# Altium PCB Demo_v1_2.PcbDoc (part 1 of 2)
Units mil, origin at the board's own origin, x right, y up, seen from the top; angles counter-clockwise.
Board outline 4921.26 x 5610.24 mil, 2 copper layers (Top Layer, Bottom Layer); 188 components, 170 nets, 730 pads, 115 vias.
Unrouted connection lines stored in the file: 12.
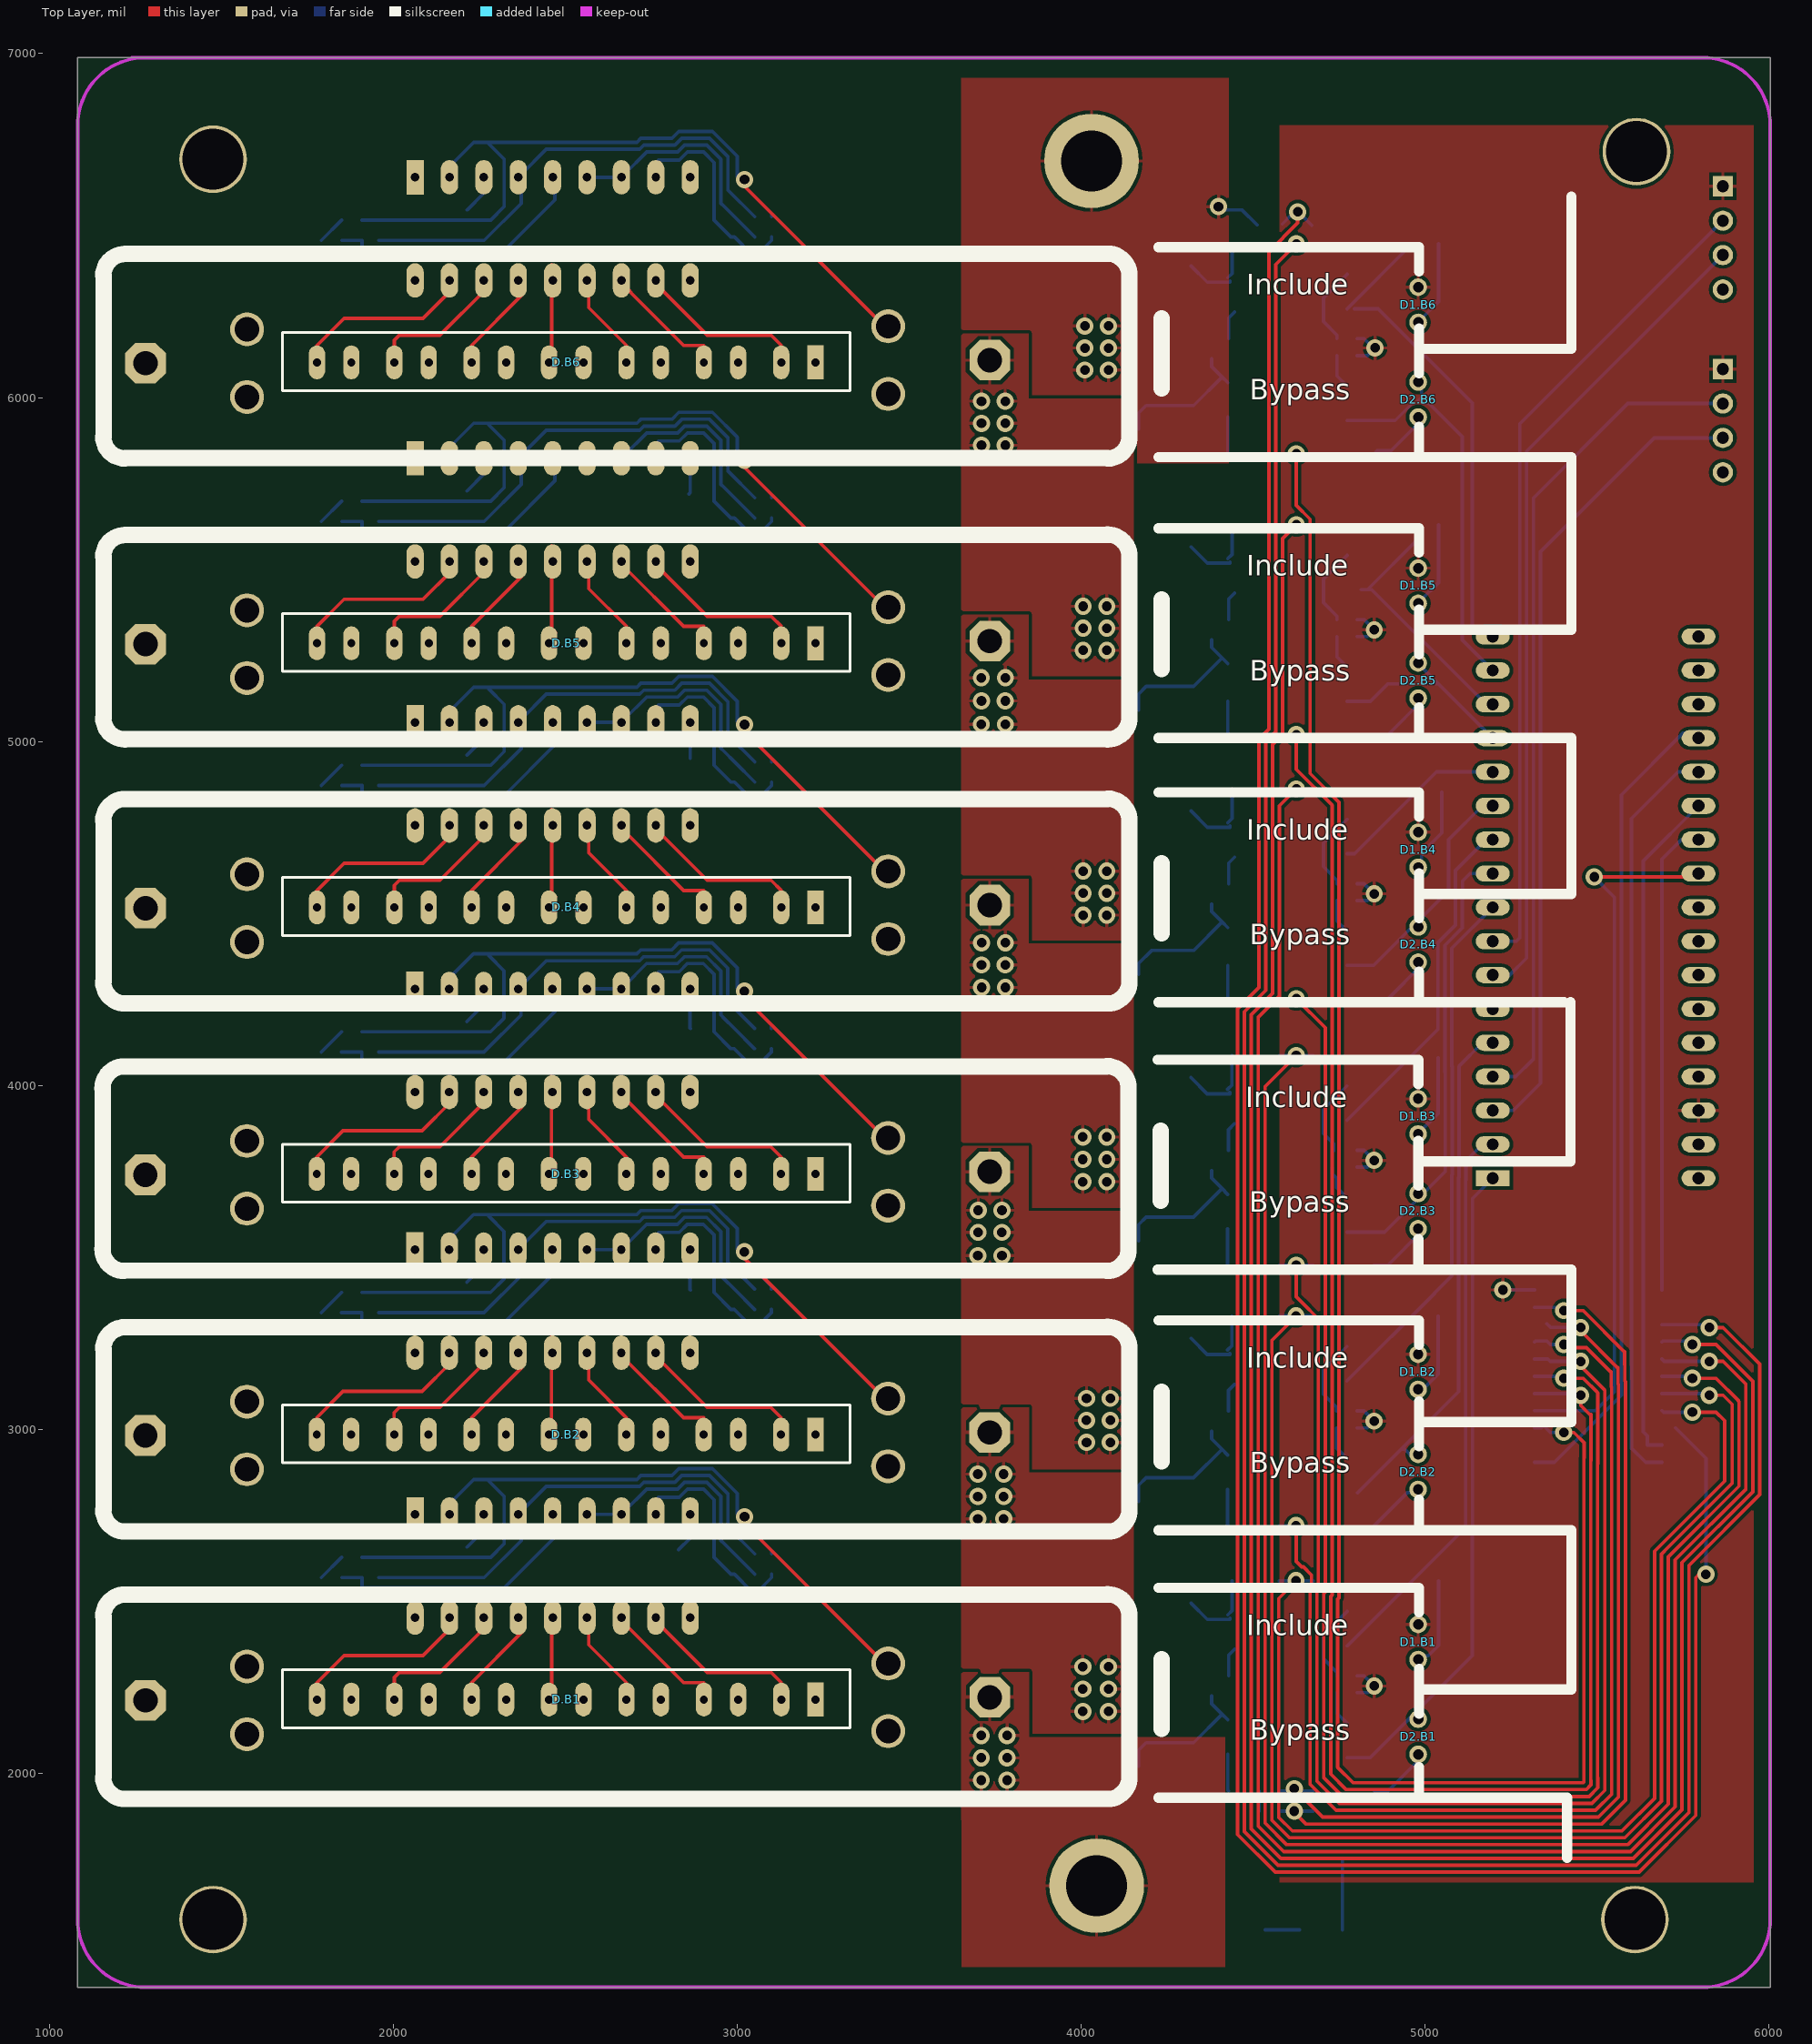
[diagram p0: Top Layer view]
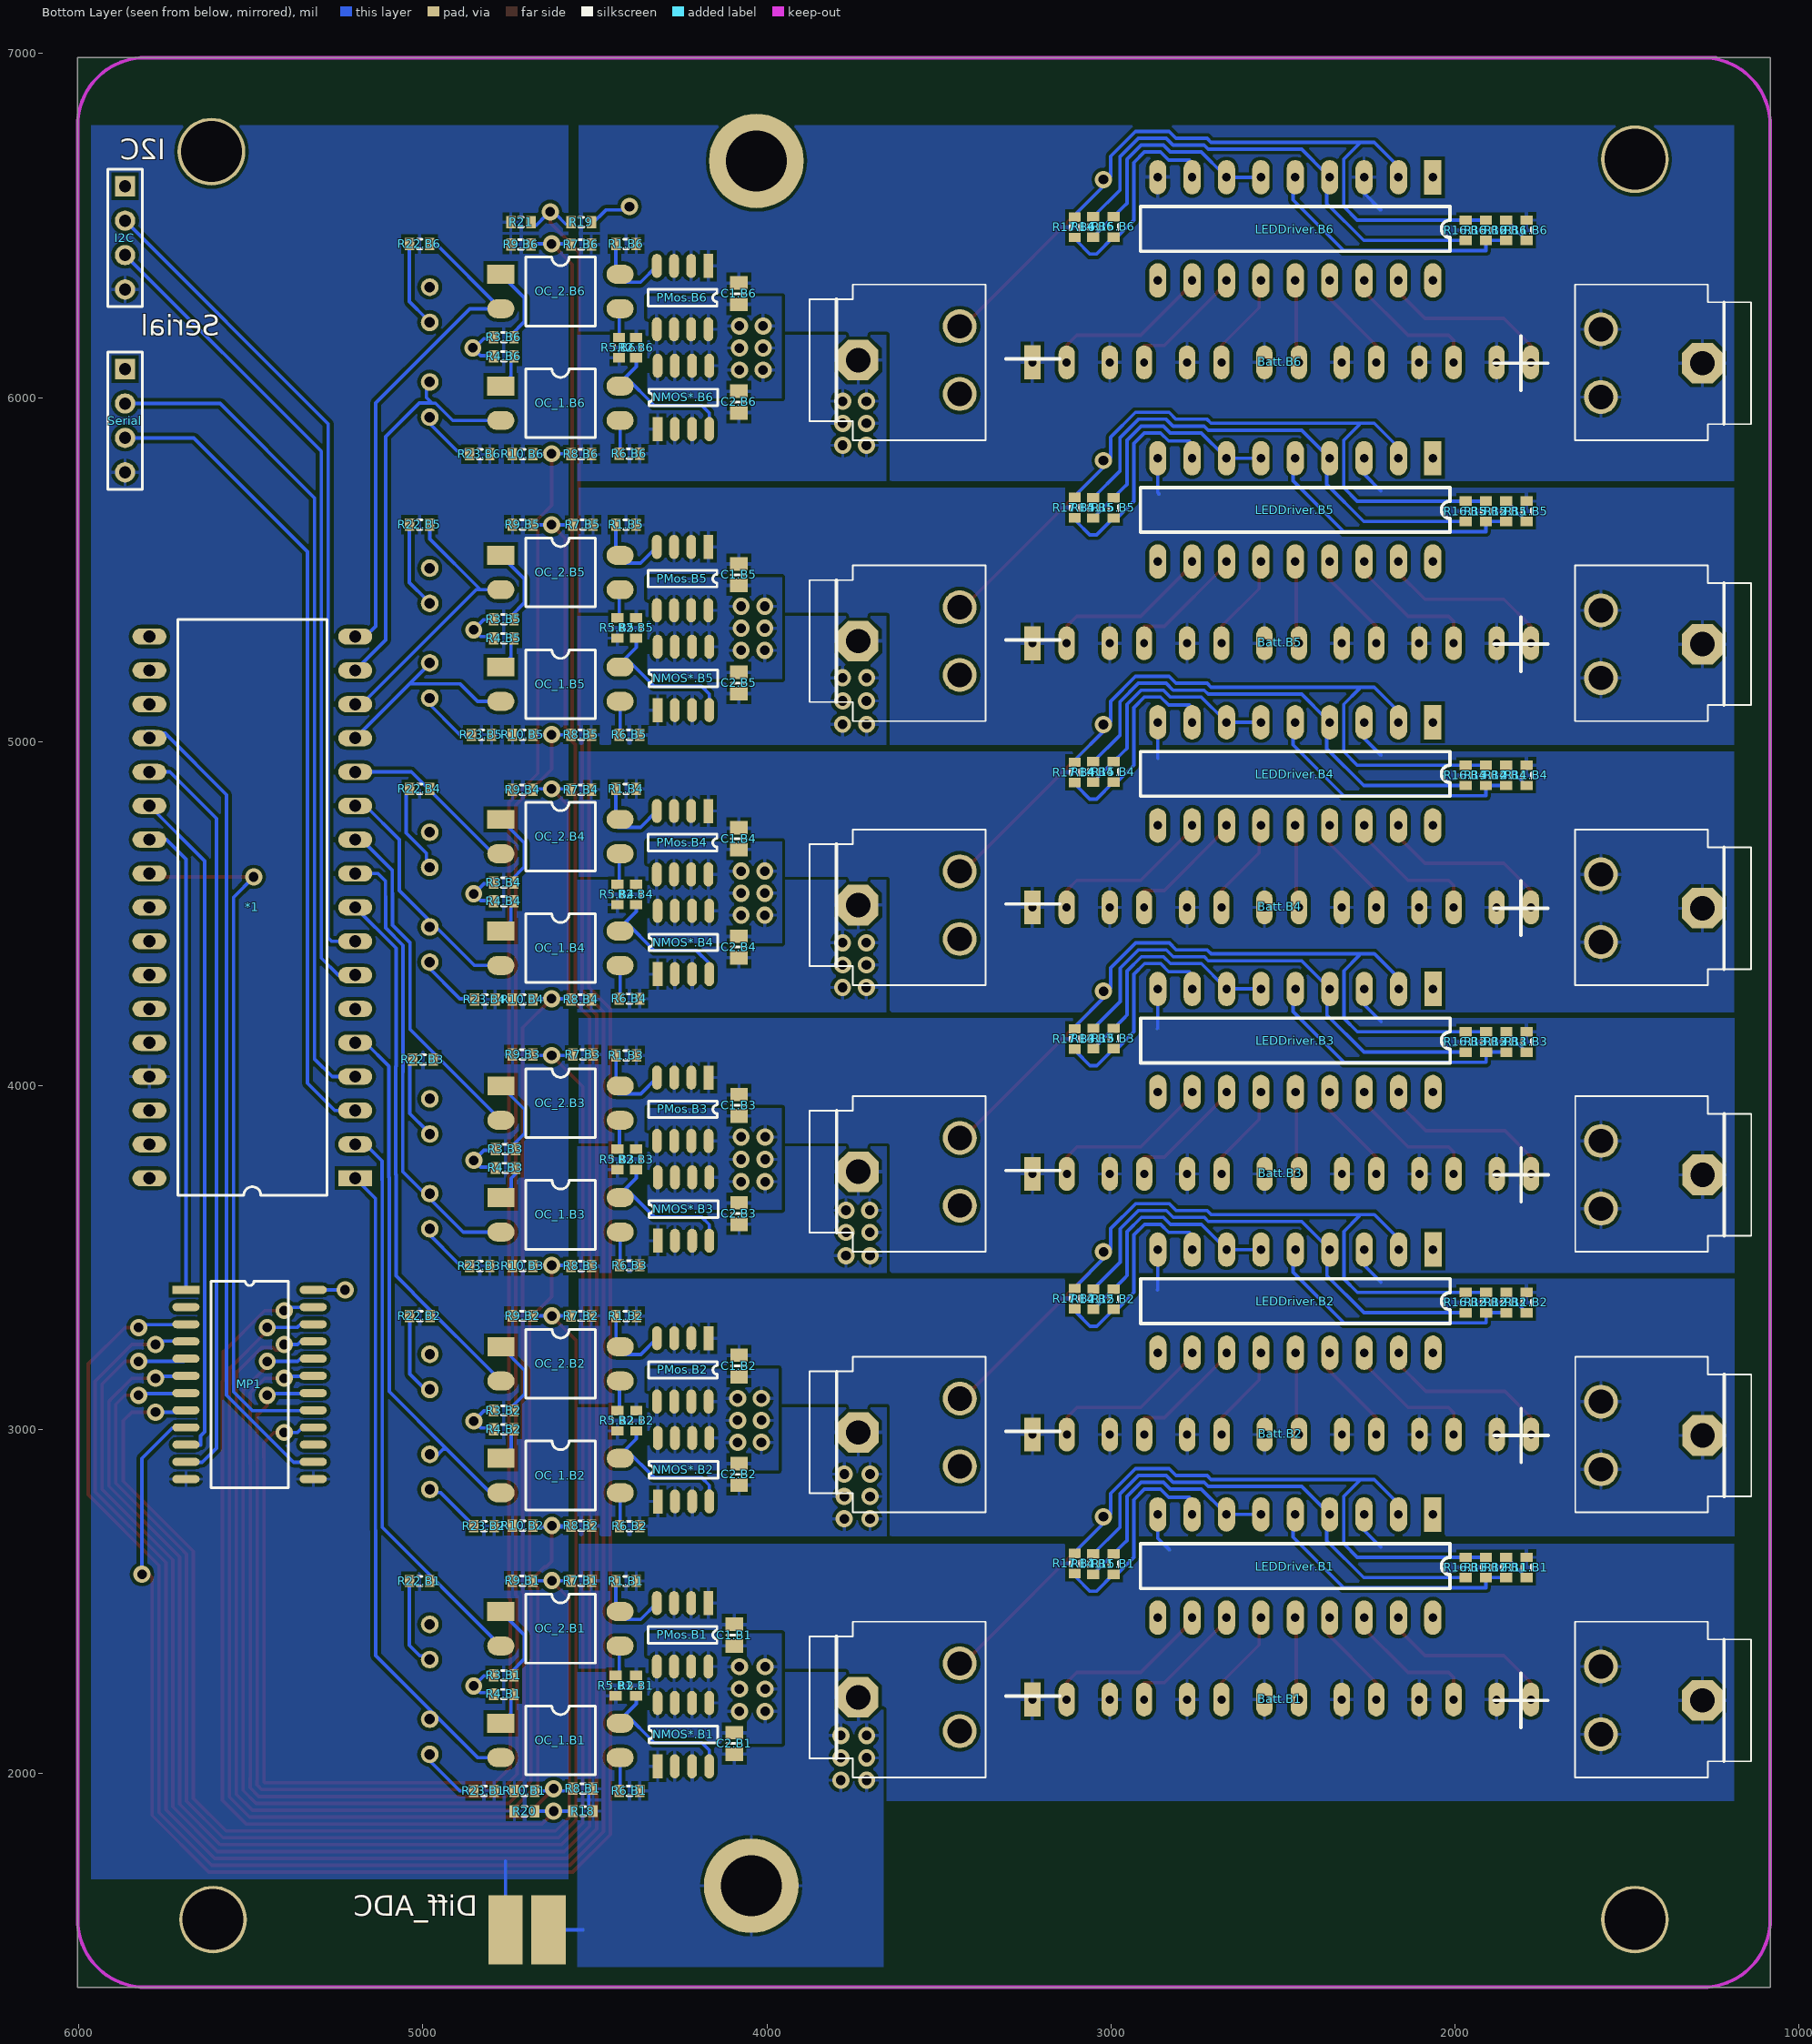
[diagram p1: Bottom Layer view, seen from below]

## Layer stack, top to bottom
Top Solder: solder mask 0.4, Solder Resist, Dk 3.5
Top Layer: signal copper 1.4
Dielectric 1: dielectric 12.6, FR-4, Dk 4.8
Bottom Layer: signal copper 1.4
Bottom Solder: solder mask 0.4, Solder Resist, Dk 3.5

## Board outline
1082.68,1377.95 6003.94,1377.95 6003.94,6988.19 1082.68,6988.19

## Design rules (kind name [scope] priority, off if disabled: settings)
Clearance [All] p1: gap=10
ComponentClearance ComponentClearance_1 [HasFootprint('6-0805_L') vs HasFootprint('DIP18')] p1: gap=0 collisioncheckmode=3 verticalgap=0 showdistances=FALSE
ComponentClearance [All] p2: gap=10 collisioncheckmode=3 verticalgap=10 showdistances=FALSE
HoleSize [All] p1: absolutevalues=TRUE maxlimit=248.03 minlimit=11.81 maxpercent=80.000 minpercent=20.000
MinimumSolderMaskSliver [All] p1: minsoldermaskwidth=6
PolygonConnect [All] p1: connectstyle=Relief reliefconductorwidth=10 reliefentries=4 polygonreliefangle="90 Angle" airgapwidth=10
RoomDefinition SwitchingModule [InComponentClass('SwitchingModule')] p1: confinementstyle=ConfineIn formatcopy=TRUE lockcomponents=FALSE outline 4429.13,1653.54 5994.09,1653.54 5994.09,6742.13 4429.13,6742.13
RoomDefinition B2 [InComponentClass('B2')] p2: confinementstyle=ConfineIn formatcopy=TRUE lockcomponents=FALSE outline 1121.65,2669.78 5304.72,2669.78 5304.72,3663.88 1121.65,3663.88
RoomDefinition u1 [InComponentClass('u1')] p3: confinementstyle=ConfineIn formatcopy=TRUE lockcomponents=FALSE outline 5078.74,3641.02 5925.2,3641.02 5925.2,6692.91 5078.74,6692.91
RoomDefinition Mutliplex [InComponentClass('Mutliplex')] p4: confinementstyle=ConfineIn formatcopy=TRUE lockcomponents=FALSE outline 4906.97,2651.18 5994.09,2651.18 5994.09,3635.43 4906.97,3635.43
RoomDefinition B6 [InComponentClass('B6')] p5: confinementstyle=ConfineIn formatcopy=TRUE lockcomponents=FALSE outline 1122.05,5787.4 5305.12,5787.4 5305.12,6781.5 1122.05,6781.5
RoomDefinition B5 [InComponentClass('B5')] p6: confinementstyle=ConfineIn formatcopy=TRUE lockcomponents=FALSE outline 1122.05,4970.47 5305.12,4970.47 5305.12,5964.57 1122.05,5964.57
RoomDefinition B4 [InComponentClass('B4')] p7: confinementstyle=ConfineIn formatcopy=TRUE lockcomponents=FALSE outline 1122.05,4202.76 5305.12,4202.76 5305.12,5196.85 1122.05,5196.85
RoomDefinition B3 [InComponentClass('B3')] p8: confinementstyle=ConfineIn formatcopy=TRUE lockcomponents=FALSE outline 1121.65,3427.66 5304.72,3427.66 5304.72,4421.75 1121.65,4421.75
RoomDefinition B1 [InComponentClass('B1')] p9: confinementstyle=ConfineIn formatcopy=TRUE lockcomponents=FALSE outline 1122.05,1899.61 5305.12,1899.61 5305.12,2893.7 1122.05,2893.7
RoutingVias [All] p1: holewidth=28 width=50 viastyle="Through Hole" minholewidth=28 minwidth=50 maxholewidth=28 maxwidth=50
SilkToSolderMaskClearance [IsPad] p1 off: minsilkscreentomaskgap=10 clearancetoexposedcopper=TRUE
SolderMaskExpansion [All] p1: expansion=4
Width [All] p1: maxlimit=10 minlimit=10 preferedwidth=10
26 further rules are at their usual default settings.

## Classes and differential pairs
net class B-ADC[6..1]: B-ADC1 B-ADC2 B-ADC3 B-ADC4 B-ADC5 B-ADC6
net class B+ADC[6..1]: B+ADC1 B+ADC2 B+ADC3 B+ADC4 B+ADC5 B+ADC6
component class Mutliplex: MP1
channel class BS: B1 B2 B3 B4 B5 B6
net class PCTRL[6..1]: PCTRL1 PCTRL2 PCTRL3 PCTRL4 PCTRL5 PCTRL6
net class NCTRL[6..1]: NCTRL1 NCTRL2 NCTRL3 NCTRL4 NCTRL5 NCTRL6
net class B_OUT[6..1]: B_OUT6
net class B_IN[6..1]: B_IN1 B_IN2 B_IN3 B_IN4 B_IN5 B_IN6
component class u1: *1 I2C Serial
component class SwitchingModule: R18 R19 R20 R21
component class B6: Batt.B6 C1.B6 C2.B6 D1.B6 D2.B6 D.B6 LEDDriver.B6 NMOS*.B6 OC_1.B6 OC_2.B6 PMos.B6 R1.B6 R2.B6 R3.B6 R4.B6 R5.B6 R6.B6 R7.B6 R8.B6 R9.B6 R10.B6 R11.B6 R12.B6 R13.B6 R14.B6 R15.B6 R16.B6 R17.B6 R22.B6 R23.B6
component class B5: Batt.B5 C1.B5 C2.B5 D1.B5 D2.B5 D.B5 LEDDriver.B5 NMOS*.B5 OC_1.B5 OC_2.B5 PMos.B5 R1.B5 R2.B5 R3.B5 R4.B5 R5.B5 R6.B5 R7.B5 R8.B5 R9.B5 R10.B5 R11.B5 R12.B5 R13.B5 R14.B5 R15.B5 R16.B5 R17.B5 R22.B5 R23.B5
component class B4: Batt.B4 C1.B4 C2.B4 D1.B4 D2.B4 D.B4 LEDDriver.B4 NMOS*.B4 OC_1.B4 OC_2.B4 PMos.B4 R1.B4 R2.B4 R3.B4 R4.B4 R5.B4 R6.B4 R7.B4 R8.B4 R9.B4 R10.B4 R11.B4 R12.B4 R13.B4 R14.B4 R15.B4 R16.B4 R17.B4 R22.B4 R23.B4
component class B3: Batt.B3 C1.B3 C2.B3 D1.B3 D2.B3 D.B3 LEDDriver.B3 NMOS*.B3 OC_1.B3 OC_2.B3 PMos.B3 R1.B3 R2.B3 R3.B3 R4.B3 R5.B3 R6.B3 R7.B3 R8.B3 R9.B3 R10.B3 R11.B3 R12.B3 R13.B3 R14.B3 R15.B3 R16.B3 R17.B3 R22.B3 R23.B3
component class B2: Batt.B2 C1.B2 C2.B2 D1.B2 D2.B2 D.B2 LEDDriver.B2 NMOS*.B2 OC_1.B2 OC_2.B2 PMos.B2 R1.B2 R2.B2 R3.B2 R4.B2 R5.B2 R6.B2 R7.B2 R8.B2 R9.B2 R10.B2 R11.B2 R12.B2 R13.B2 R14.B2 R15.B2 R16.B2 R17.B2 R22.B2 R23.B2
component class B1: Batt.B1 C1.B1 C2.B1 D1.B1 D2.B1 D.B1 LEDDriver.B1 NMOS*.B1 OC_1.B1 OC_2.B1 PMos.B1 R1.B1 R2.B1 R3.B1 R4.B1 R5.B1 R6.B1 R7.B1 R8.B1 R9.B1 R10.B1 R11.B1 R12.B1 R13.B1 R14.B1 R15.B1 R16.B1 R17.B1 R22.B1 R23.B1

## Components (designator, comment, footprint, x,y, rotation, side; value= is the part's Value field where it differs from the comment)
*1 "Arduino_Micro" DIP34 5196.85,3730.32 r0 bottom
Batt.B1 "Antenna" 18650_PCB_HOLDER 2518.11,2224.41 r0 bottom (schematic designator Batt)
Batt.B2 "Antenna" 18650_PCB_HOLDER 2517.72,2994.59 r0 bottom (schematic designator Batt)
Batt.B3 "Antenna" 18650_PCB_HOLDER 2517.72,3752.46 r0 bottom (schematic designator Batt)
Batt.B4 "Antenna" 18650_PCB_HOLDER 2518.11,4527.56 r0 bottom (schematic designator Batt)
Batt.B5 "Antenna" 18650_PCB_HOLDER 2518.11,5295.28 r0 bottom (schematic designator Batt)
Batt.B6 "Antenna" 18650_PCB_HOLDER 2518.11,6112.2 r0 bottom (schematic designator Batt)
C1.B1 "Cap" 6-0805_L 4094.49,2401.57 r90 bottom (schematic designator C1)
C1.B2 "Cap" 6-0805_L 4081.02,3184.23 r90 bottom (schematic designator C1)
C1.B3 "Cap" 6-0805_L 4081.02,3942.11 r90 bottom (schematic designator C1)
C1.B4 "Cap" 6-0805_L 4081.42,4717.2 r90 bottom (schematic designator C1)
C1.B5 "Cap" 6-0805_L 4081.42,5484.92 r90 bottom (schematic designator C1)
C1.B6 "Cap" 6-0805_L 4081.42,6301.85 r90 bottom (schematic designator C1)
C2.B1 "Cap" 6-0805_L 4094.49,2086.61 r90 bottom (schematic designator C2)
C2.B2 "Cap" 6-0805_L 4081.02,2869.27 r90 bottom (schematic designator C2)
C2.B3 "Cap" 6-0805_L 4081.02,3627.15 r90 bottom (schematic designator C2)
C2.B4 "Cap" 6-0805_L 4081.42,4402.24 r90 bottom (schematic designator C2)
C2.B5 "Cap" 6-0805_L 4081.42,5169.96 r90 bottom (schematic designator C2)
C2.B6 "Cap" 6-0805_L 4081.42,5986.89 r90 bottom (schematic designator C2)
D1.B1 "LED1" LED 4980.31,2381.89 r270 top (schematic designator D1)
D1.B2 "LED1" LED 4979.92,3167.35 r270 top (schematic designator D1)
D1.B3 "LED1" LED 4979.92,3909.94 r270 top (schematic designator D1)
D1.B4 "LED1" LED 4980.31,4685.04 r270 top (schematic designator D1)
D1.B5 "LED1" LED 4980.31,5452.76 r270 top (schematic designator D1)
D1.B6 "LED1" LED 4980.31,6269.69 r270 top (schematic designator D1)
D2.B1 "LED1" LED 4980.31,2106.3 r270 top (schematic designator D2)
D2.B2 "LED1" LED 4979.92,2876.48 r270 top (schematic designator D2)
D2.B3 "LED1" LED 4979.92,3634.35 r270 top (schematic designator D2)
D2.B4 "LED1" LED 4980.31,4409.45 r270 top (schematic designator D2)
D2.B5 "LED1" LED 4980.31,5177.17 r270 top (schematic designator D2)
D2.B6 "LED1" LED 4980.31,5994.09 r270 top (schematic designator D2)
D.B1 "LED" "LED Strip" 3228.35,2214.57 r270 top (schematic designator D)
D.B2 "LED" "LED Strip" 3227.95,2984.74 r270 top (schematic designator D)
D.B3 "LED" "LED Strip" 3227.95,3742.62 r270 top (schematic designator D)
D.B4 "LED" "LED Strip" 3228.35,4517.72 r270 top (schematic designator D)
D.B5 "LED" "LED Strip" 3228.35,5285.43 r270 top (schematic designator D)
D.B6 "LED" "LED Strip" 3228.35,6102.36 r270 top (schematic designator D)
I2C "I2C Header" HDR1X4 5866.14,6614.17 r270 bottom
LEDDriver.B1 "LM3914" DIP18 2063.7,2752.64 r270 bottom (schematic designator LEDDriver)
LEDDriver.B2 "LM3914" DIP18 2063.31,3522.82 r270 bottom (schematic designator LEDDriver)
LEDDriver.B3 "LM3914" DIP18 2063.31,4280.69 r270 bottom (schematic designator LEDDriver)
LEDDriver.B4 "LM3914" DIP18 2063.7,5055.79 r270 bottom (schematic designator LEDDriver)
LEDDriver.B5 "LM3914" DIP18 2063.7,5823.5 r270 bottom (schematic designator LEDDriver)
LEDDriver.B6 "LM3914" DIP18 2063.7,6640.43 r270 bottom (schematic designator LEDDriver)
MP1 "Multiplexer CD4097" SOIC24 5688.98,3405.51 r180 bottom
NMOS*.B1 "Mosfet-N" MOSFET 4317.64,2020.35 r90 bottom (schematic designator NMOS*)
NMOS*.B2 "Mosfet-N" MOSFET 4317.24,2790.53 r90 bottom (schematic designator NMOS*)
NMOS*.B3 "Mosfet-N" MOSFET 4317.24,3548.41 r90 bottom (schematic designator NMOS*)
NMOS*.B4 "Mosfet-N" MOSFET 4317.64,4323.5 r90 bottom (schematic designator NMOS*)
NMOS*.B5 "Mosfet-N" MOSFET 4317.64,5091.22 r90 bottom (schematic designator NMOS*)
NMOS*.B6 "Mosfet-N" MOSFET 4317.64,5908.15 r90 bottom (schematic designator NMOS*)
OC_1.B1 "OptoCoupler" SMDIP4 4773.62,2145.67 r180 bottom (schematic designator OC_1)
OC_1.B2 "OptoCoupler" SMDIP4 4773.23,2915.85 r180 bottom (schematic designator OC_1)
OC_1.B3 "OptoCoupler" SMDIP4 4773.23,3673.72 r180 bottom (schematic designator OC_1)
OC_1.B4 "OptoCoupler" SMDIP4 4773.62,4448.82 r180 bottom (schematic designator OC_1)
OC_1.B5 "OptoCoupler" SMDIP4 4773.62,5216.54 r180 bottom (schematic designator OC_1)
OC_1.B6 "OptoCoupler" SMDIP4 4773.62,6033.46 r180 bottom (schematic designator OC_1)
OC_2.B1 "OptoCoupler" SMDIP4 4773.62,2470.47 r180 bottom (schematic designator OC_2)
OC_2.B2 "OptoCoupler" SMDIP4 4773.23,3240.65 r180 bottom (schematic designator OC_2)
OC_2.B3 "OptoCoupler" SMDIP4 4773.23,3998.52 r180 bottom (schematic designator OC_2)
OC_2.B4 "OptoCoupler" SMDIP4 4773.62,4773.62 r180 bottom (schematic designator OC_2)
OC_2.B5 "OptoCoupler" SMDIP4 4773.62,5541.34 r180 bottom (schematic designator OC_2)
OC_2.B6 "OptoCoupler" SMDIP4 4773.62,6358.27 r180 bottom (schematic designator OC_2)
PMos.B1 "Mosfet-P" MOSFET 4170,2494.76 r270 bottom (schematic designator PMos)
PMos.B2 "Mosfet-P" MOSFET 4169.61,3264.94 r270 bottom (schematic designator PMos)
PMos.B3 "Mosfet-P" MOSFET 4169.61,4022.82 r270 bottom (schematic designator PMos)
PMos.B4 "Mosfet-P" MOSFET 4170,4797.91 r270 bottom (schematic designator PMos)
PMos.B5 "Mosfet-P" MOSFET 4170,5565.63 r270 bottom (schematic designator PMos)
PMos.B6 "Mosfet-P" MOSFET 4170,6382.56 r270 bottom (schematic designator PMos)
R1.B1 "Res3" J1-0603 4409.45,2559.05 r180 bottom (schematic designator R1)
R1.B2 "Res3" J1-0603 4409.06,3329.23 r180 bottom (schematic designator R1)
R1.B3 "Res3" J1-0603 4409.06,4087.11 r180 bottom (schematic designator R1)
R1.B4 "Res3" J1-0603 4409.45,4862.2 r180 bottom (schematic designator R1)
R1.B5 "Res3" J1-0603 4409.45,5629.92 r180 bottom (schematic designator R1)
R1.B6 "Res3" J1-0603 4409.45,6446.85 r180 bottom (schematic designator R1)
R2.B1 "Res3" J1-0603 4380,2255 r90 bottom (schematic designator R2)
R2.B2 "Res3" J1-0603 4379.61,3025.18 r90 bottom (schematic designator R2)
R2.B3 "Res3" J1-0603 4380,3785 r90 bottom (schematic designator R2)
R2.B4 "Res3" J1-0603 4380,4555 r90 bottom (schematic designator R2)
R2.B5 "Res3" J1-0603 4380,5330 r90 bottom (schematic designator R2)
R2.B6 "Res3" J1-0603 4380,6145 r90 bottom (schematic designator R2)
R3.B1 "Res3" J1-0603 4765,2285 r0 bottom (schematic designator R3)
R3.B2 "Res3" J1-0603 4765,3055 r0 bottom (schematic designator R3)
R3.B3 "Res3" J1-0603 4760,3815 r0 bottom (schematic designator R3)
R3.B4 "Res3" J1-0603 4765,4590 r0 bottom (schematic designator R3)
R3.B5 "Res3" J1-0603 4765,5355 r0 bottom (schematic designator R3)
R3.B6 "Res3" J1-0603 4765,6175 r0 bottom (schematic designator R3)
R4.B1 "Res3" J1-0603 4765,2230 r0 bottom (schematic designator R4)
R4.B2 "Res3" J1-0603 4765,3000 r0 bottom (schematic designator R4)
R4.B3 "Res3" J1-0603 4760,3760 r0 bottom (schematic designator R4)
R4.B4 "Res3" J1-0603 4765,4535 r0 bottom (schematic designator R4)
R4.B5 "Res3" J1-0603 4765,5300 r0 bottom (schematic designator R4)
R4.B6 "Res3" J1-0603 4765,6120 r0 bottom (schematic designator R4)
R5.B1 "Res3" J1-0603 4440,2255 r90 bottom (schematic designator R5)
R5.B2 "Res3" J1-0603 4435,3025 r90 bottom (schematic designator R5)
R5.B3 "Res3" J1-0603 4435,3785 r90 bottom (schematic designator R5)
R5.B4 "Res3" J1-0603 4435,4555 r90 bottom (schematic designator R5)
R5.B5 "Res3" J1-0603 4435,5330 r90 bottom (schematic designator R5)
R5.B6 "Res3" J1-0603 4430,6145 r90 bottom (schematic designator R5)
R6.B1 "Res3" J1-0603 4399.61,1948.82 r0 bottom (schematic designator R6)
R6.B2 "Res3" J1-0603 4399.21,2719 r0 bottom (schematic designator R6)
R6.B3 "Res3" J1-0603 4399.21,3476.87 r0 bottom (schematic designator R6)
R6.B4 "Res3" J1-0603 4399.61,4251.97 r0 bottom (schematic designator R6)
R6.B5 "Res3" J1-0603 4399.61,5019.69 r0 bottom (schematic designator R6)
R6.B6 "Res3" J1-0603 4399.61,5836.61 r0 bottom (schematic designator R6)
R7.B1 "Res3" J1-0603 4540,2560 r0 bottom (schematic designator R7)
R7.B2 "Res3" J1-0603 4540,3330 r0 bottom (schematic designator R7)
R7.B3 "Res3" J1-0603 4535,4090 r0 bottom (schematic designator R7)
R7.B4 "Res3" J1-0603 4540,4860 r0 bottom (schematic designator R7)
R7.B5 "Res3" J1-0603 4535,5630 r0 bottom (schematic designator R7)
R7.B6 "Res3" J1-0603 4540,6445 r0 bottom (schematic designator R7)
R8.B1 "Res3" J1-0603 4535,1955 r0 bottom (schematic designator R8)
R8.B2 "Res3" J1-0603 4540,2720 r0 bottom (schematic designator R8)
R8.B3 "Res3" J1-0603 4540,3475 r0 bottom (schematic designator R8)
R8.B4 "Res3" J1-0603 4540,4250 r0 bottom (schematic designator R8)
R8.B5 "Res3" J1-0603 4540,5020 r0 bottom (schematic designator R8)
R8.B6 "Res3" J1-0603 4540,5835 r0 bottom (schematic designator R8)
R9.B1 "Res3" J1-0603 4710,2560 r180 bottom (schematic designator R9)
R9.B2 "Res3" J1-0603 4710,3330 r180 bottom (schematic designator R9)
R9.B3 "Res3" J1-0603 4710,4090 r180 bottom (schematic designator R9)
R9.B4 "Res3" J1-0603 4710,4860 r180 bottom (schematic designator R9)
R9.B5 "Res3" J1-0603 4710,5630 r180 bottom (schematic designator R9)
R9.B6 "Res3" J1-0603 4715,6445 r180 bottom (schematic designator R9)
R10.B1 "Res3" J1-0603 4704.72,1948.82 r180 bottom (schematic designator R10)
R10.B2 "Res3" J1-0603 4710,2720 r180 bottom (schematic designator R10)
R10.B3 "Res3" J1-0603 4710,3475 r180 bottom (schematic designator R10)
R10.B4 "Res3" J1-0603 4710,4250 r180 bottom (schematic designator R10)
R10.B5 "Res3" J1-0603 4710,5020 r180 bottom (schematic designator R10)
R10.B6 "Res3" J1-0603 4710,5835 r180 bottom (schematic designator R10)
R11.B1 "Res3" J1-0603 1791.34,2598.43 r90 bottom (schematic designator R11)
R11.B2 "Res3" J1-0603 1790.95,3368.6 r90 bottom (schematic designator R11)
R11.B3 "Res3" J1-0603 1790.95,4126.48 r90 bottom (schematic designator R11)
R11.B4 "Res3" J1-0603 1791.34,4901.57 r90 bottom (schematic designator R11)
R11.B5 "Res3" J1-0603 1791.34,5669.29 r90 bottom (schematic designator R11)
R11.B6 "Res3" J1-0603 1791.34,6486.22 r90 bottom (schematic designator R11)
R12.B1 "Res3" J1-0603 1850.39,2598.42 r90 bottom (schematic designator R12)
R12.B2 "Res3" J1-0603 1850,3368.6 r90 bottom (schematic designator R12)
R12.B3 "Res3" J1-0603 1850,4126.48 r90 bottom (schematic designator R12)
R12.B4 "Res3" J1-0603 1850.39,4901.57 r90 bottom (schematic designator R12)
R12.B5 "Res3" J1-0603 1850.39,5669.29 r90 bottom (schematic designator R12)
R12.B6 "Res3" J1-0603 1850.39,6486.22 r90 bottom (schematic designator R12)
R13.B1 "Res3" J1-0603 1909.45,2598.43 r270 bottom (schematic designator R13)
R13.B2 "Res3" J1-0603 1909.06,3368.6 r270 bottom (schematic designator R13)
R13.B3 "Res3" J1-0603 1909.06,4126.48 r270 bottom (schematic designator R13)
R13.B4 "Res3" J1-0603 1909.45,4901.57 r270 bottom (schematic designator R13)
R13.B5 "Res3" J1-0603 1909.45,5669.29 r270 bottom (schematic designator R13)
R13.B6 "Res3" J1-0603 1909.45,6486.22 r270 bottom (schematic designator R13)
R14.B1 "Res3" J1-0603 3051.18,2608.27 r270 bottom (schematic designator R14)
R14.B2 "Res3" J1-0603 3050.79,3378.44 r270 bottom (schematic designator R14)
R14.B3 "Res3" J1-0603 3050.79,4136.32 r270 bottom (schematic designator R14)
R14.B4 "Res3" J1-0603 3051.18,4911.42 r270 bottom (schematic designator R14)
R14.B5 "Res3" J1-0603 3051.18,5679.13 r270 bottom (schematic designator R14)
R14.B6 "Res3" J1-0603 3051.18,6496.06 r270 bottom (schematic designator R14)
R15.B1 "Res3" J1-0603 2992.13,2608.27 r90 bottom (schematic designator R15)
R15.B2 "Res3" J1-0603 2991.73,3378.44 r90 bottom (schematic designator R15)
R15.B3 "Res3" J1-0603 2991.73,4136.32 r90 bottom (schematic designator R15)
R15.B4 "Res3" J1-0603 2992.13,4911.42 r90 bottom (schematic designator R15)
R15.B5 "Res3" J1-0603 2992.13,5679.13 r90 bottom (schematic designator R15)
R15.B6 "Res3" J1-0603 2992.13,6496.06 r90 bottom (schematic designator R15)
R16.B1 "Res3" J1-0603 1968.5,2598.43 r270 bottom (schematic designator R16)
R16.B2 "Res3" J1-0603 1968.11,3368.6 r270 bottom (schematic designator R16)
R16.B3 "Res3" J1-0603 1968.11,4126.48 r270 bottom (schematic designator R16)
R16.B4 "Res3" J1-0603 1968.5,4901.57 r270 bottom (schematic designator R16)
R16.B5 "Res3" J1-0603 1968.5,5669.29 r270 bottom (schematic designator R16)
R16.B6 "Res3" J1-0603 1968.5,6486.22 r270 bottom (schematic designator R16)
R17.B1 "Res3" J1-0603 3105,2610 r270 bottom (schematic designator R17)
R17.B2 "Res3" J1-0603 3105,3380 r270 bottom (schematic designator R17)
R17.B3 "Res3" J1-0603 3105,4135 r270 bottom (schematic designator R17)
R17.B4 "Res3" J1-0603 3105,4910 r270 bottom (schematic designator R17)
R17.B5 "Res3" J1-0603 3105,5680 r270 bottom (schematic designator R17)
R17.B6 "Res3" J1-0603 3105,6495 r270 bottom (schematic designator R17)
R18 "Res3" J1-0603 4535,1890 r0 bottom
R19 "Res3" J1-0603 4540,6510 r0 bottom
R20 "Res3" J1-0603 4704.72,1889.76 r180 bottom
R21 "Res3" J1-0603 4715,6510 r180 bottom
R22.B1 "Res3" J1-0603 5009.84,2559.06 r0 bottom (schematic designator R22)
R22.B2 "Res3" J1-0603 5009.45,3329.23 r0 bottom (schematic designator R22)
R22.B3 "Res3" J1-0603 5000,4074.8 r0 bottom (schematic designator R22)
R22.B4 "Res3" J1-0603 5009.84,4862.2 r0 bottom (schematic designator R22)
R22.B5 "Res3" J1-0603 5009.84,5629.92 r0 bottom (schematic designator R22)
R22.B6 "Res3" J1-0603 5009.84,6446.85 r0 bottom (schematic designator R22)
R23.B1 "Res3" J1-0603 4822.83,1948.82 r0 bottom (schematic designator R23)
R23.B2 "Res3" J1-0603 4822.44,2719 r0 bottom (schematic designator R23)
R23.B3 "Res3" J1-0603 4835,3475 r0 bottom (schematic designator R23)
R23.B4 "Res3" J1-0603 4820,4250 r0 bottom (schematic designator R23)
R23.B5 "Res3" J1-0603 4830,5020 r0 bottom (schematic designator R23)
R23.B6 "Res3" J1-0603 4835,5835 r0 bottom (schematic designator R23)
Serial "SerialHeader" HDR1X4 5866.14,6082.68 r270 bottom

## Footprints (in the part's own frame and the unit in brackets; to place one, negate y for a bottom-side part, rotate by r counter-clockwise, add the part's x,y. Pads: shape width x height; smd on the part's side, far side on the other; paste and mask are expansions set on the pad)
6-0805_L [mm] "Chip Resistor, Body 2.0x1.2mm, IPC High Density"
  rect 1x1.3 smd: 1(-0.8,0) 2(0.8,0)
  silkscreen extent 0,-0.55 0,0.55, body extent -1.07,-0.7 1.07,0.7, height 0.7
18650_PCB_HOLDER [mm]
  round 2.5 hole 1.8: N(23.4,-2.412) N(23.4,2.588) P(-23.95,-2.188) P(-23.95,2.812)
  oct 3x3 hole 1.8: N(30.9,0.088) P(-31.45,0.312)
  silkscreen extent -35.05,-5.5 34.5,6
DIP18 [mil]
  rect 100x50 hole 25: 1(0,0)
  oval 100x50 hole 25: 2(0,-100) 3(0,-200) 4(0,-300) 5(0,-400) 6(0,-500) 7(0,-600) 8(0,-700) 9(0,-800) 10(300,-800) 11(300,-700) 12(300,-600) 13(300,-500) 14(300,-400) 15(300,-300) 16(300,-200) 17(300,-100) 18(300,0)
  silkscreen extent 85,-850 215,50
DIP34 [mm]
  rect 2.5x1.2 hole 0.9: 1(0,0)
  oval 2.5x1.2 hole 0.9: 2(0,-2.5) 3(0,-5) 4(0,-7.5) 5(0,-10) 6(0,-12.5) 7(0,-15) 8(0,-17.5) 9(0,-20) 10(0,-22.5) 11(0,-25) 12(0,-27.5) 13(0,-30) 14(0,-32.5) 15(0,-35) 16(0,-37.5) 17(0,-40) 18(15.2,-40) 19(15.2,-37.5) 20(15.2,-35) 21(15.2,-32.5) 22(15.2,-30) 23(15.2,-27.5) 24(15.2,-25) 25(15.2,-22.5) 26(15.2,-20) 27(15.2,-17.5) 28(15.2,-15) 29(15.2,-12.5) 30(15.2,-10) 31(15.2,-7.5) 32(15.2,-5) 33(15.2,-2.5) 34(15.2,0)
  silkscreen extent 2.08,-41.25 13.12,1.25
HDR1X4 [mm] "Connector; Header; 4 Position"
  rect 1.5x1.5 hole 0.9: 1(0,0)
  round 1.5 hole 0.9: 2(2.54,0) 3(5.08,0) 4(7.62,0)
  silkscreen extent -1.27,-1.27 8.89,1.27
J1-0603 [mm] "Chip Resistor, Body 1.6x0.8mm, IPC High Density"
  rect 0.7x0.9 smd: 1(-0.75,0) 2(0.75,0)
  silkscreen extent -0.2,-0.35 0.2,0.35, body extent -0.85,-0.48 0.85,0.48, height 0.9
LED [mm]
  round 1.3 hole 0.762: 1(-1.3,0) 2(1.3,0)
"LED Strip" [mm]
  rect 2.5x1.2 hole 0.6: 1(0,0)
  oval 2.5x1.2 hole 0.6: 2(0,-2.54) 3(0,-5.715) 4(0,-8.255) 5(0,-11.43) 6(0,-13.97) 7(0,-17.145) 8(0,-19.685) 9(0,-22.86) 10(0,-25.4) 11(0,-28.575) 12(0,-31.115) 13(0,-34.29) 14(0,-36.83)
  silkscreen extent -2.2,-39.37 2.08,2.54
MOSFET [mm]
  oval 1.78x0.72 smd: 1(0,-2.54) 1(0,-1.27) 4(0,-3.81) 5(4.68,-3.81) 5(4.68,-2.54) 5(4.68,-1.27) 5(4.68,0)
  rect 1.78x0.72 smd: 1(0,0)
  silkscreen extent 1.72,-4.44 2.96,0.63
SMDIP4 [mm]
  rect 2x1.4 smd: 1(0,0)
  oval 2x1.4 smd: 2(0,-2.54) 3(8.81,-2.54) 4(8.81,0)
  silkscreen extent 1.84,-3.81 6.98,1.27
SOIC24 [mm]
  rect 2x0.6 smd: 1(0,0)
  oval 2x0.6 smd: 2(0,-1.27) 3(0,-2.54) 4(0,-3.81) 5(0,-5.08) 6(0,-6.35) 7(0,-7.62) 8(0,-8.89) 9(0,-10.16) 10(0,-11.43) 11(0,-12.7) 12(0,-13.97) 13(9.4,-13.97) 14(9.4,-12.7) 15(9.4,-11.43) 16(9.4,-10.16) 17(9.4,-8.89) 18(9.4,-7.62) 19(9.4,-6.35) 20(9.4,-5.08) 21(9.4,-3.81) 22(9.4,-2.54) 23(9.4,-1.27) 24(9.4,0)
  silkscreen extent 1.84,-14.6 7.56,0.63

## Part data
Batt.B1 Batt.B2 Batt.B3 Batt.B4 Batt.B5 Batt.B6: library part BATTERYHOLDER
C1.B1 C1.B2 C1.B3 C1.B4 C1.B5 C1.B6 C2.B1 C2.B2 C2.B3 C2.B4 C2.B5 C2.B6: "Capacitor"
D1.B1 D1.B2 D1.B3 D1.B4 D1.B5 D1.B6 D2.B1 D2.B2 D2.B3 D2.B4 D2.B5 D2.B6: "Typical RED GaAs LED"
D.B1 D.B2 D.B3 D.B4 D.B5 D.B6: library part LEDStrip
I2C Serial: library part "Header 4", "Header, 4-Pin"
R1.B1 R1.B2 R1.B3 R1.B4 R1.B5 R1.B6 R2.B1 R2.B2 R2.B3 R2.B4 R2.B5 R2.B6 R3.B1 R3.B2 R3.B3 R3.B4 R3.B5 R3.B6 R4.B1 R4.B2 R4.B3 R4.B4 R4.B5 R4.B6 R5.B1 R5.B2 R5.B3 R5.B4 R5.B5 R5.B6 R6.B1 R6.B2 R6.B3 R6.B4 R6.B5 R6.B6 R7.B1 R7.B2 R7.B3 R7.B4 R7.B5 R7.B6 R8.B1 R8.B2 R8.B3 R8.B4 R8.B5 R8.B6 R9.B1 R9.B2 R9.B3 R9.B4 R9.B5 R9.B6 R10.B1 R10.B2 R10.B3 R10.B4 R10.B5 R10.B6 R11.B1 R11.B2 R11.B3 R11.B4 R11.B5 R11.B6 R12.B1 R12.B2 R12.B3 R12.B4 R12.B5 R12.B6 R13.B1 R13.B2 R13.B3 R13.B4 R13.B5 R13.B6 R14.B1 R14.B2 R14.B3 R14.B4 R14.B5 R14.B6 R15.B1 R15.B2 R15.B3 R15.B4 R15.B5 R15.B6 R16.B1 R16.B2 R16.B3 R16.B4 R16.B5 R16.B6 R17.B1 R17.B2 R17.B3 R17.B4 R17.B5 R17.B6 R18 R19 R20 R21 R22.B1 R22.B2 R22.B3 R22.B4 R22.B5 R22.B6 R23.B1 R23.B2 R23.B3 R23.B4 R23.B5 R23.B6: "Resistor"

## Free pads (board coordinates)
  round 275.59 hole 177.17: 2(4030.43,6687.91) 3(4045.43,1673.23)
  round 196.85 hole 177.17: 4(5615,6715) 5(5610.24,1574.8) 6(1476.38,1574.8) 8(1476.38,6692.91)
  rect 100x200 smd far side: 10(4760,1545) 11(4635,1545)

## Via types
v1: diameter 50, hole 28, Top Layer to Bottom Layer, 115 vias

## Nets (pads, with @x,y where several pads share a name; then routed paths per layer and width w, separated by ;. In a path a pad name is that pad's centre, name@x,y a point inside that pad or via, vN(x,y) a via of type N, cw(c..) or ccw(c..) an arc to the next point about the centre after c; other vN are vias at no path point)
+5: *1.32 D1.B1.1 D1.B2.1 D1.B3.1 D1.B4.1 D1.B5.1 D1.B6.1 I2C.1 MP1.24 R3.B1.2 R3.B2.2 R3.B3.2 R3.B4.2 R3.B5.2 R3.B6.2 R4.B1.2 R4.B2.2 R4.B3.2 R4.B4.2 R4.B5.2 R4.B6.2 Serial.1 | length 810.7
  Bottom Layer w10: R4.B2.2@4802.76,3004.43 4832.28,3004.43 v1(4851.97,3024.11) 4822.44,3053.64 R3.B2.2@4802.76,3053.64 ; R4.B3.2@4802.76,3762.3 4832.28,3762.3 v1(4851.97,3781.99) 4822.44,3811.52 R3.B3.2@4802.76,3811.52 ; R4.B1.2@4803.15,2234.25 4832.68,2234.25 v1(4852.36,2253.94) 4822.83,2283.46 R3.B1.2@4803.15,2283.46 ; R4.B4.2@4803.15,4537.4 4832.68,4537.4 v1(4852.36,4557.09) 4822.83,4586.61 R3.B4.2@4803.15,4586.61 ; R4.B5.2@4803.15,5305.12 4832.68,5305.12 v1(4852.36,5324.8) 4822.83,5354.33 R3.B5.2@4803.15,5354.33 ; R4.B6.2@4803.15,6122.05 4832.68,6122.05 v1(4855,6144.37) 4849.72,6144.37 4822.83,6171.26 R3.B6.2@4803.15,6171.26 ; v1(5226.38,3405.51) MP1.24@5318.9,3405.51
ADC+: *1.24 MP1.1 | length 1382.1
  Bottom Layer w10: MP1.1@5688.98,3405.51 5688.98,4657.84 5745.71,4714.57 *1.24@5795.28,4714.57
ADC-: *1.25 MP1.17 | length 2083.4
  Top Layer w10: v1(5492.13,4606.3) 5785.43,4606.3 *1.25@5795.28,4616.14
  Bottom Layer w10: MP1.17@5318.9,3054.33 5496.14,3054.33 5550.87,3109.06 5550.87,4547.09 5492.13,4605.83 v1(5492.13,4606.3)
B+ADC1: MP1.8 R7.B1.2 R9.B1.2 | length 3335.2
  Top Layer w10: v1(4625,2560) 4626.93,2560 4575,2508.07 4575,1871.85 4614.25,1832.6 5572.76,1832.6 5667.4,1927.24 5667.4,2645.75 5701.85,2680.2 5871.06,2849.41 5871.06,3025.39 5846.46,3050 v1(5777.56,3050)
  Bottom Layer w10: R7.B1.2@4576.77,2559.05 4577.72,2560 v1(4625,2560) 4674.25,2560 R9.B1.2@4675.2,2559.05 ; MP1.8@5688.98,3054.33 5693.31,3050 v1(5777.56,3050)
B+ADC2: MP1.7 R7.B2.2 R9.B2.2 | length 4258
  Top Layer w10: v1(4625,3330) 4625,3328.64 4555,3258.64 4555,1863.57 4605.97,1812.6 5581.04,1812.6 5687.4,1918.96 5687.4,2637.46 5708.06,2658.13 5893.13,2843.2 5893.13,3072.85 5866.77,3099.21 v1(5826.77,3099.21)
  Bottom Layer w10: R7.B2.2@4576.38,3329.23 4577.15,3330 v1(4625,3330) 4674.03,3330 R9.B2.2@4674.8,3329.23 ; MP1.7@5688.98,3104.33 5822.05,3104.33 5826.77,3109.06 v1(5826.77,3099.21)
B+ADC3: MP1.6 R7.B3.2 R9.B3.2 | length 5134.6
  Top Layer w10: v1(4625.59,4087.11) 4535,3996.51 4535,1855.28 4597.68,1792.6 5589.32,1792.6 5707.4,1910.68 5707.4,2629.18 5716.35,2638.13 5913.13,2834.91 5913.13,3081.13 5911.06,3083.21 5911.06,3083.82 5846.46,3148.43 v1(5777.56,3148.43)
  Bottom Layer w10: R7.B3.2@4576.38,4087.11 v1(4625.59,4087.11) R9.B3.2@4674.8,4087.11 ; MP1.6@5688.98,3154.33 5773.62,3154.33 5777.56,3158.27 v1(5777.56,3148.43)
B+ADC4: MP1.5 R7.B4.2 R9.B4.2 | length 6045.1
  Top Layer w10: v1(4625.98,4862.2) 4577.09,4813.31 4577.09,4259.64 4515,4197.55 4515,1847 4589.4,1772.6 5597.61,1772.6 5727.4,1902.39 5727.4,2620.9 5933.13,2826.63 5933.13,3131.28 5866.77,3197.64 v1(5826.77,3197.64)
  Bottom Layer w10: R7.B4.2@4576.77,4862.2 v1(4625.98,4862.2) R9.B4.2@4675.2,4862.2 ; MP1.5@5688.98,3204.33 5695.67,3197.64 v1(5826.77,3197.64)
B+ADC5: MP1.4 R7.B5.2 R9.B5.2 | length 6941
  Top Layer w10: v1(4625.98,5629.92) 4585.98,5589.92 4585.98,5019.69 4557.09,4990.79 4557.09,4267.92 4495,4205.84 4495,1838.71 4581.12,1752.6 5605.89,1752.6 5747.4,1894.11 5747.4,2612.61 5953.13,2818.34 5953.13,3139.56 5951.06,3141.63 5951.06,3142.24 5846.46,3246.85 v1(5777.56,3246.85)
  Bottom Layer w10: R7.B5.2@4576.77,5629.92 v1(4625.98,5629.92) R9.B5.2@4675.2,5629.92 ; MP1.4@5688.98,3254.33 5691.34,3256.69 5777.56,3256.69 v1(5777.56,3246.85)
B+ADC6: MP1.3 R7.B6.2 R9.B6.2 | length 7894.5
  Top Layer w10: v1(4625.98,6446.85) 4565.98,6386.85 4565.98,5027.97 4537.09,4999.07 4537.09,4276.21 4475,4214.12 4475,1830.43 4572.83,1732.6 5614.18,1732.6 5767.4,1885.82 5767.4,2604.33 5973.13,2810.06 5973.13,3189.7 5866.77,3296.06 v1(5826.77,3296.06)
  Bottom Layer w10: R7.B6.2@4576.77,6446.85 v1(4625.98,6446.85) R9.B6.2@4675.2,6446.85 ; MP1.3@5688.98,3304.33 5818.5,3304.33 v1(5826.77,3296.06)
B-ADC1: MP1.22 R8.B1.2 R10.B1.2 | length 2604.6
  Top Layer w10: v1(4620,1955) 4620,1954.8 4702.2,1872.6 5504.49,1872.6 5562.83,1930.94 5562.83,3130.55 5561.34,3132.05 5561.34,3175.72 5561.02,3176.03 5561.02,3179.45 ; v1@5452.76,3286.22 5560.71,3178.27
  Bottom Layer w10: R8.B1.2@4576.77,1948.82 R10.B1.2@4675.2,1948.82 ; MP1.22@5354.33,3307.09 5364.72,3296.69 5452.13,3296.69 v1(5452.76,3296.06)
B-ADC2: MP1.21 R8.B2.2 R10.B2.2 | length 3339.9
  Top Layer w10: v1@4625.59,2719 4625.59,2616.02 4641.61,2600 4646.57,2600 4670,2576.57 4670,2543.43 4665.98,2539.42 4665.98,1967.87 4741.26,1892.6 5496.2,1892.6 5542.83,1939.23 5542.83,3122.27 5541.34,3123.77 5541.34,3167.43 ; v1@5403.54,3230.45 5429,3230.45 5436.19,3237.64 5469.32,3237.64 5540.71,3166.25
  Bottom Layer w10: v1(4625,2720) 4577.38,2720 4576.38,2719 ccw(c4578.84,2719) 4578.84,2716.54 4672.34,2716.54 ccw(c4672.34,2719) R10.B2.2@4674.8,2719 ; MP1.21@5318.9,3254.33 5321.26,3256.69 5354.33,3256.69 5364.17,3246.85 v1(5403.54,3246.85)
B-ADC3: MP1.20 R8.B3.2 R10.B3.2 | length 3899.7
  Top Layer w10: v1(4625.59,3476.87) 4625.59,3385.8 4641.39,3370 4641.57,3370 4690,3321.57 4690,2535.15 4685.98,2531.13 4685.98,1977.4 4750.79,1912.6 5485.43,1912.6 5522.83,1950 5522.83,3113.99 ; v1@5452.76,3177.95 5458.87,3177.95 5520.71,3116.11
  Bottom Layer w10: R8.B3.2@4576.38,3476.87 v1(4625.59,3476.87) R10.B3.2@4674.8,3476.87 ; MP1.20@5318.9,3204.33 5357.48,3204.33 5364.17,3197.64 v1(5452.76,3197.64)
B-ADC4: MP1.19 R8.B4.2 R10.B4.2 | length 4579.1
  Top Layer w10: v1(4625.98,4251.97) 4710,4167.95 4710,2526.86 4705.98,2522.85 4705.98,1986.93 4760.31,1932.6 5477.15,1932.6 5502.6,1958.05 5502.6,1986.65 5501.97,1987.28 5501.97,2899.88 5502.61,2900.51 5502.61,3105.93 ; v1(5403.54,3148.43) 5460.11,3148.43 5500.71,3107.83
  Bottom Layer w10: R8.B4.2@4576.77,4251.97 v1(4625.98,4251.97) R10.B4.2@4675.19,4251.97 ; MP1.19@5318.9,3154.33 5397.64,3154.33 v1(5403.54,3148.43)
B-ADC5: MP1.18 R8.B5.2 R10.B5.2 | length 5228.4
  Top Layer w10: v1(4625.98,5019.68) 4625.98,4918.77 4730,4814.76 4730,2518.58 4725.98,2514.56 4725.98,1997.7 4771.09,1952.6 5468.86,1952.6 5482.6,1966.33 5482.6,1978.36 5481.97,1978.99 5481.97,2908.16 5482.61,2908.8 5482.61,2972.76 5482.28,2973.09 5482.28,3042.91 ; v1(5452.76,3099.21) 5452.76,3069.68 5480.71,3041.73
  Bottom Layer w10: R8.B5.2@4576.77,5019.68 v1(4625.98,5019.68) R10.B5.2@4675.19,5019.69 ; MP1.18@5318.9,3104.33 5427.95,3104.33 5433.07,3099.21 v1(5452.76,3099.21)
B-ADC6: MP1.16 R8.B6.2 R10.B6.2 | length 5860.3
  Top Layer w10: v1(4625.98,5836.61) 4625.98,5686.49 4665.98,5646.49 4665.98,4907.06 4750,4823.04 4750,2510.29 4745.98,2506.28 4745.98,2017.4 4790.79,1972.6 5460.58,1972.6 5461.97,1973.99 5461.97,2916.44 5462.61,2917.08 5462.61,2961.41 5433.07,2990.94 v1(5403.54,2990.94)
  Bottom Layer w10: R8.B6.2@4576.77,5836.62 v1(4625.98,5836.61) R10.B6.2@4675.19,5836.61 ; MP1.16@5318.9,3004.33 5338.19,3004.33 5344.69,3010.83 5364.57,2990.94 v1(5403.54,2990.94)
B_IN1: Batt.B1.N C2.B1.1 LEDDriver.B1.2 NMOS*.B1.1 pad.3 pad.11 R5.B1.1 R6.B1.1 R8.B1.1 R13.B1.1 R16.B1.1 R17.B1.1 R18.1 | length 2548
  Top Layer w10: v1@3011.81,2746.06 3011.81,2736.22 v1@3016.73,2731.3 ; Batt.B1.N@3428.43,2322.83 3425.2,2322.83 v1@3021.63,2726.4 ; v1@3016.73,2731.3 v1@3021.63,2726.4 ; v1@3016.73,2731.3 3021.63,2736.21 v1@3021.63,2726.4
  Bottom Layer w10: R13.B1.1@1909.45,2627.95 2283.46,2627.95 2322.83,2667.32 2322.83,2805.12 2278.54,2849.41 ; LEDDriver.B1.2@2172.05,2761.1 2172.05,2792.13 2234.25,2854.33 2708.71,2854.33 2720.48,2866.1 2810.63,2866.1 2830.63,2886.1 2928.34,2886.1 3000.72,2813.72 3000.72,2754.66 3003.18,2754.66 3021.63,2736.21 v1@3016.73,2731.3 ; v1@3021.63,2726.4 3100.39,2647.64 R17.B1.1@3100.39,2637.8 ; R18.1@4517.72,1889.76 R8.B1.1@4517.72,1948.82 ; 4535,1545 pad.11@4635,1545
  other v1: 3710,1980 3785,1980 3710,2045 3785,2045 3710,2110 3785,2110 3021.65,2746.06
B_IN2: Batt.B2.N C1.B1.1 C2.B1.2 C2.B2.1 LEDDriver.B2.2 NMOS*.B1.5 NMOS*.B2.1 PMos.B1.5 R5.B2.1 R6.B2.1 R8.B2.1 R13.B2.1 R16.B2.1 R17.B2.1 | length 2388.9
  Top Layer w10: v1@3011.42,3516.24 3011.42,3506.4 v1@3016.33,3501.48 ; Batt.B2.N@3428.03,3093.01 3424.8,3093.01 v1@3021.24,3496.57 ; v1@3016.33,3501.48 3021.24,3506.39 v1@3021.24,3496.57 ; v1@3016.33,3501.48 v1@3021.24,3496.57
  Bottom Layer w10: R13.B2.1@1909.06,3398.13 R16.B2.1@1968.11,3398.13 2283.07,3398.13 2322.44,3437.5 2322.44,3575.3 2278.15,3619.59 ; LEDDriver.B2.2@2171.65,3531.28 2171.65,3562.3 2233.86,3624.51 2708.31,3624.51 2720.08,3636.28 2810.23,3636.28 2830.23,3656.28 2927.95,3656.28 3000.33,3583.9 3000.33,3524.84 3002.79,3524.84 3021.24,3506.39 v1@3016.33,3501.48 ; v1@3021.24,3496.57 3100,3417.82 R17.B2.1@3100,3407.97
  other v1: 4005,2180 4080,2180 4005,2245 4080,2245 4005,2310 4080,2310 3700,2740 3775,2740 3700,2805 3775,2805 3700,2870 3775,2870 3021.26,3516.24
B_IN3: Batt.B3.N C1.B2.1 C2.B2.2 C2.B3.1 LEDDriver.B3.2 NMOS*.B2.5 NMOS*.B3.1 PMos.B2.5 R5.B3.1 R6.B3.1 R8.B3.1 R13.B3.1 R16.B3.1 R17.B3.1 | length 2388.9
  Top Layer w10: v1@3011.42,4274.12 3011.42,4264.27 v1@3016.33,4259.36 ; Batt.B3.N@3428.03,3850.89 3424.8,3850.89 v1@3021.24,4254.45 ; v1@3016.33,4259.36 3021.24,4264.26 v1@3021.24,4254.45 ; v1@3016.33,4259.36 v1@3021.24,4254.45
  Bottom Layer w10: R13.B3.1@1909.06,4156 R16.B3.1@1968.11,4156 2283.07,4156 2322.44,4195.37 2322.44,4333.17 2278.15,4377.46 ; LEDDriver.B3.2@2171.65,4289.15 2171.65,4320.18 2233.86,4382.38 2708.31,4382.38 2720.08,4394.15 2810.23,4394.15 2830.23,4414.15 2927.95,4414.15 3000.33,4341.77 3000.33,4282.71 3002.79,4282.71 3021.24,4264.26 v1@3016.33,4259.36 ; v1@3021.24,4254.45 3100,4175.69 R17.B3.1@3100,4165.85
  other v1: 4016.1,2962 4085,2962 4015.75,3026.22 4085,3026.22 4016,3090.22 4085,3090.22 3700,3505 3770,3505 3700.79,3572.83 3769.69,3572.83 3701.1,3637 3770,3637 3021.26,4274.11
B_IN4: Batt.B4.N C1.B3.1 C2.B3.2 C2.B4.1 LEDDriver.B4.2 NMOS*.B3.5 NMOS*.B4.1 PMos.B3.5 R5.B4.1 R6.B4.1 R8.B4.1 R13.B4.1 R16.B4.1 R17.B4.1 | length 2388.9
  Top Layer w10: v1@3011.81,5049.21 3011.81,5039.37 v1@3016.73,5034.45 ; Batt.B4.N@3428.43,4625.98 3425.2,4625.98 v1@3021.63,5029.55 ; v1@3016.73,5034.45 3021.63,5039.36 v1@3021.63,5029.55 ; v1@3016.73,5034.45 v1@3021.63,5029.55
  Bottom Layer w10: R13.B4.1@1909.45,4931.1 R16.B4.1@1968.5,4931.1 2283.46,4931.1 2322.83,4970.47 2322.83,5108.27 2278.54,5152.56 ; LEDDriver.B4.2@2172.05,5064.25 2172.05,5095.28 2234.25,5157.48 2708.71,5157.48 2720.48,5169.25 2810.63,5169.25 2830.63,5189.25 2928.34,5189.25 3000.72,5116.87 3000.72,5057.81 3003.18,5057.81 3021.63,5039.36 v1@3016.73,5034.45 ; v1@3021.63,5029.55 3100.39,4950.79 R17.B4.1@3100.39,4940.95
  other v1: 4005,3720 4075,3720 4005,3785 4075,3785 4005,3850 4075,3850 3711.1,4285 3780,4285 3710.63,4350.39 3779.53,4350.39 3711.1,4415 3780,4415 3021.65,5049.21
B_IN5: Batt.B5.N C1.B4.1 C2.B4.2 C2.B5.1 LEDDriver.B5.2 NMOS*.B4.5 NMOS*.B5.1 PMos.B4.5 R5.B5.1 R6.B5.1 R8.B5.1 R13.B5.1 R16.B5.1 R17.B5.1 | length 2388.9
  Top Layer w10: v1@3011.81,5816.93 3011.81,5807.09 v1@3016.73,5802.17 ; Batt.B5.N@3428.43,5393.7 3425.2,5393.7 v1@3021.63,5797.26 ; v1@3016.73,5802.17 3021.63,5807.08 v1@3021.63,5797.26 ; v1@3016.73,5802.17 v1@3021.63,5797.26
  Bottom Layer w10: R13.B5.1@1909.45,5698.82 R16.B5.1@1968.5,5698.82 2283.46,5698.82 2322.83,5738.19 2322.83,5875.98 2278.54,5920.28 ; LEDDriver.B5.2@2172.05,5831.97 2172.05,5862.99 2234.25,5925.2 2708.71,5925.2 2720.48,5936.97 2810.63,5936.97 2830.63,5956.97 2928.34,5956.97 3000.72,5884.58 3000.72,5825.53 3003.18,5825.53 3021.63,5807.08 v1@3016.73,5802.17 ; v1@3021.63,5797.26 3100.39,5718.5 R17.B5.1@3100.39,5708.66
  other v1: 4006.1,4495 4075,4495 4006.1,4559.06 4075,4559.06 4006.1,4623.11 4075,4623.11 3710,5050 3780,5050 3710.63,5118.11 3779.53,5118.11 3710,5185 3780,5185 3021.65,5816.93
B_IN6: Batt.B6.N C1.B5.1 C2.B5.2 C2.B6.1 LEDDriver.B6.2 NMOS*.B5.5 NMOS*.B6.1 PMos.B5.5 R5.B6.1 R6.B6.1 R8.B6.1 R13.B6.1 R16.B6.1 R17.B6.1 | length 2388.9
  Top Layer w10: v1@3011.81,6633.86 3011.81,6624.02 v1@3016.73,6619.1 ; Batt.B6.N@3428.43,6210.63 3425.2,6210.63 v1@3021.63,6614.19 ; v1@3016.73,6619.1 3021.63,6624.01 v1@3021.63,6614.19 ; v1@3016.73,6619.1 v1@3021.63,6614.19
  Bottom Layer w10: R13.B6.1@1909.45,6515.75 R16.B6.1@1968.5,6515.75 2283.46,6515.75 2322.83,6555.12 2322.83,6692.91 2278.54,6737.21 ; LEDDriver.B6.2@2172.05,6648.9 2172.05,6679.92 2234.25,6742.13 2708.71,6742.13 2720.48,6753.9 2810.63,6753.9 2830.63,6773.9 2928.34,6773.9 3000.72,6701.51 3000.72,6642.46 3003.18,6642.46 3021.63,6624.01 v1@3016.73,6619.1 ; v1@3021.63,6614.19 3100.39,6535.43 R17.B6.1@3100.39,6525.59
  other v1: 4006.1,5265 4075,5265 4006.1,5329.06 4075,5329.06 4006.1,5393.11 4075,5393.11 3710.63,5861.14 3779.53,5861.14 3710.63,5925.2 3779.53,5925.2 3710.63,5989.25 3779.53,5989.25 3021.65,6633.86
B_OUT6: C1.B6.1 C2.B6.2 NMOS*.B6.5 pad.2 PMos.B6.5 R19.1 | length 134.3
  Bottom Layer w10: v1(4399.61,6555.12) 4409.45,6545.28 4468.5,6545.28 R19.1@4511.89,6501.89
  other v1: 4011.1,6080 4080,6080 4011.1,6144.06 4080,6144.06 4011.1,6208.11 4080,6208.11
GND: *1.31 I2C.4 MP1.12 MP1.13 pad.10 R9.B1.1 R9.B2.1 R9.B3.1 R9.B4.1 R9.B5.1 R9.B6.1 R10.B1.1 R10.B2.1 R10.B3.1 R10.B4.1 R10.B5.1 R10.B6.1 R20.1 R21.1 R23.B1.1 R23.B2.1 R23.B3.1 R23.B4.1 R23.B5.1 R23.B6.1 Serial.4 | length 200
  Bottom Layer w10: pad.10@4760,1545 4760,1745
MP_A1: *1.23 MP1.10 | length 1972.4
  Bottom Layer w10: MP1.10@5688.98,2954.33 5646.85,2954.33 5646.85,2980.98 5634.61,2993.23 5634.61,4652.32 *1.23@5795.28,4812.99
MP_A2: *1.22 MP1.11 | length 2187
  Bottom Layer w10: MP1.11@5688.98,2904.33 5641.73,2904.33 5600.39,2945.67 5600.39,4776.04 5735.77,4911.42 *1.22@5795.28,4911.42
MP_A3: *1.21 MP1.14 | length 2399.4
  Bottom Layer w10: MP1.14@5318.9,2904.33 5375.98,2904.33 5570.87,3099.21 5570.87,4844.94 5749.91,5023.99 5781.13,5023.99 5781.13,5029.84 5803.56,5029.84 *1.21@5809.42,5023.99
NCTRL1: *1.1 D2.B1.1 OC_1.B1.2 | length 1899.4
  Bottom Layer w10: OC_1.B1.2@4773.62,2045.67 4840.95,2045.67 4979.07,2183.8 5137.8,2342.52 5137.8,2706.36 5138.11,2706.68 5138.11,3671.58 *1.1@5196.85,3730.32
NCTRL2: *1.5 D2.B2.1 OC_1.B2.2 | length 1557.7
  Bottom Layer w10: OC_1.B2.2@4804.04,2815.85 4931.1,2942.91 ; D2.B2.1@4989.76,2916.63 4967.22,2916.63 4940.94,2942.91 4931.1,2942.91 ; *1.5@5196.85,4124.02 5167.32,4124.02 5099.06,4055.75 5099.06,3733.43 5098.11,3732.49 5098.11,3109.92 4931.1,2942.91
NCTRL3: *1.10 D2.B3.1 OC_1.B3.2 | length 1321.5
  Bottom Layer w10: OC_1.B3.2@4773.23,3573.72 4882.78,3573.72 5059.06,3750 5059.06,4037.91 5058.31,4038.65 5058.31,4098.73 5058.11,4098.93 5058.11,4407.26 5108.58,4457.73 5108.58,4550.05 5108.9,4550.36 5108.9,4594.26 5130.78,4616.14 *1.10@5196.85,4616.14
NCTRL4: *1.12 D2.B4.1 OC_1.B4.2 | length 702
  Bottom Layer w10: OC_1.B4.2@4773.62,4348.82 4850.79,4348.82 5068.9,4566.93 5068.9,4714.57 5167.32,4812.99 *1.12@5196.85,4812.99
NCTRL5: *1.14 D2.B5.1 OC_1.B5.2 | length 595
  Bottom Layer w10: OC_1.B5.2@4773.62,5116.54 4840.95,5116.54 4891.73,5167.32 5039.37,5167.32 ; D2.B5.1@4980.31,5228.35 4980.31,5226.38 5039.37,5167.32 ; *1.14@5196.85,5009.84 5039.37,5167.32
NCTRL6: *1.16 D2.B6.1 OC_1.B6.2 | length 1169.2
  Bottom Layer w10: OC_1.B6.2@4773.62,5933.46 4913.46,5933.47 4963.5,5983.5 4973.65,5983.5 4974.4,5984.25 ; D2.B6.1@4990.16,6034.25 4990.16,6000.01 4974.4,5984.25 ; *1.16@5196.85,5206.69 5108.27,5295.28 5108.27,5886.55 5010.56,5984.25 4974.4,5984.25
Net*1_3: *1.3 Serial.3 | length 2426.6
  Bottom Layer w10: *1.3@5154.98,3927.17 *1.3@5196.85,3927.17 5256.35,3927.17 5335.59,4006.4 5335.59,5552.13 5666.14,5882.68 Serial.3@5866.14,5882.68
Net*1_4: *1.4 Serial.2 | length 2435.6
  Bottom Layer w10: *1.4@5196.85,4025.59 5263.97,4025.59 5315.59,4077.21 5315.59,5708.66 5589.61,5982.68 Serial.2@5866.14,5982.68
Net*1_7: *1.7 I2C.3 | length 2399.4
  Bottom Layer w10: *1.7@5196.85,4320.87 5246.06,4320.87 5295.28,4370.08 5295.28,4420.22 5295.59,4420.53 5295.59,5843.62 I2C.3@5866.14,6414.17
Net*1_8: *1.8 I2C.2 | length 2412.5
  Bottom Layer w10: *1.8@5196.85,4419.29 5265.75,4419.29 5275.59,4429.13 5275.59,5923.62 I2C.2@5866.14,6514.17
NetBatt.B1_P: Batt.B1.P C1.B1.2 D.B1.1 D.B1.3 D.B1.5 D.B1.7 D.B1.9 D.B1.11 D.B1.13 LEDDriver.B1.3 LEDDriver.B1.9 PMos.B1.1 R1.B1.2 R2.B1.2 R7.B1.1 R11.B1.2 | length 232.1
  Bottom Layer w10: 2214.57,2657.48 2263.7,2706.61 LEDDriver.B1.3@2263.7,2752.64 ; 2830,2650 2863.7,2683.7 LEDDriver.B1.9@2863.7,2752.64
NetBatt.B2_P: Batt.B2.P C1.B2.2 D.B2.1 D.B2.3 D.B2.5 D.B2.7 D.B2.9 D.B2.11 D.B2.13 LEDDriver.B2.3 LEDDriver.B2.9 PMos.B2.1 R1.B2.2 R2.B2.2 R7.B2.1 R11.B2.2 | length 234
  Bottom Layer w10: 2214.17,3427.66 2263.31,3476.79 LEDDriver.B2.3@2263.31,3522.82 ; LEDDriver.B2.9@2863.31,3522.82 2863.31,3406.69 2865,3405